# Altium PCB PCB_Current-Sensor.pcbdoc
Units mil, origin at the board's own origin, x right, y up, seen from the top; angles counter-clockwise.
Board outline 4377.04 x 3545.43 mil, 2 copper layers (Top Layer, Bottom Layer); 29 components, 17 nets, 80 pads, 116 vias.
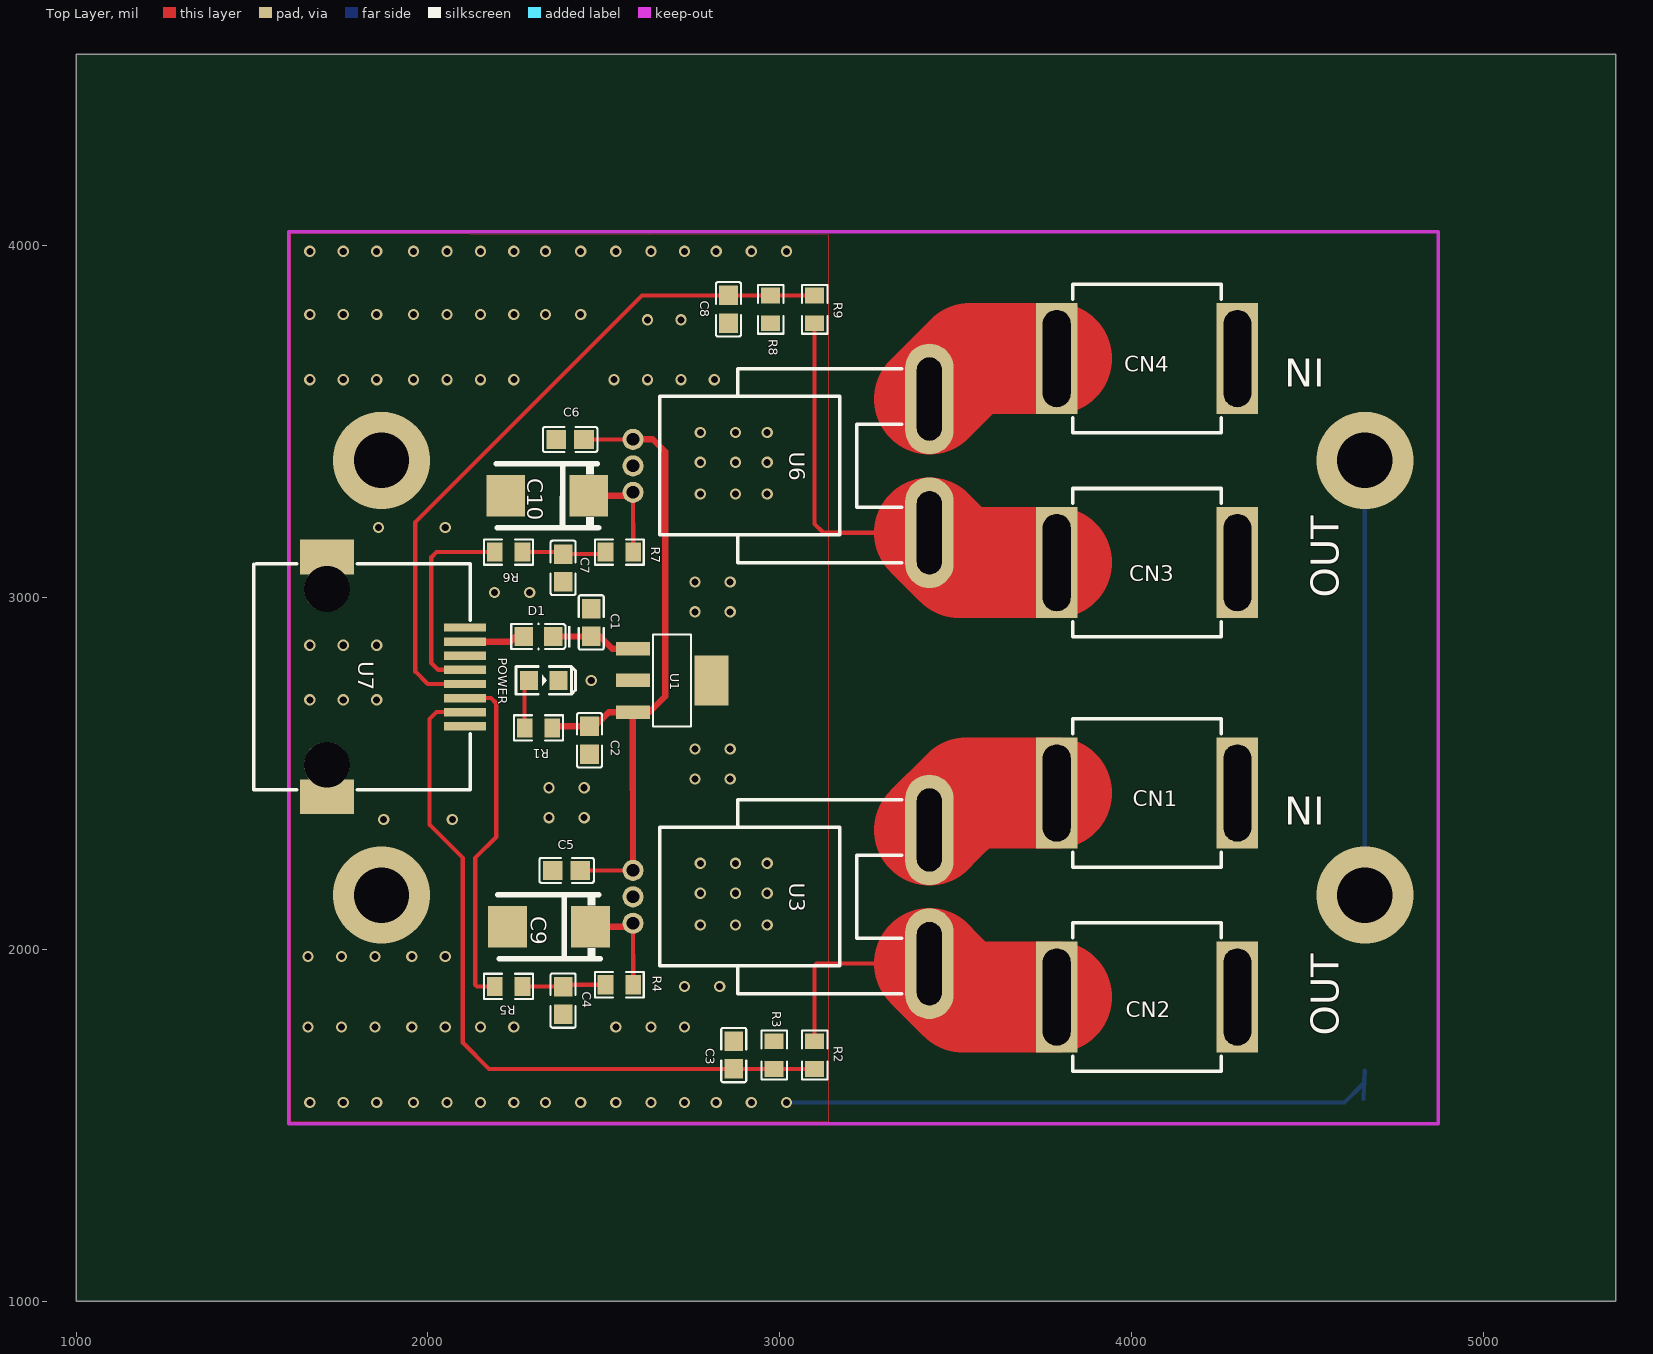
[diagram p0: Top Layer view]
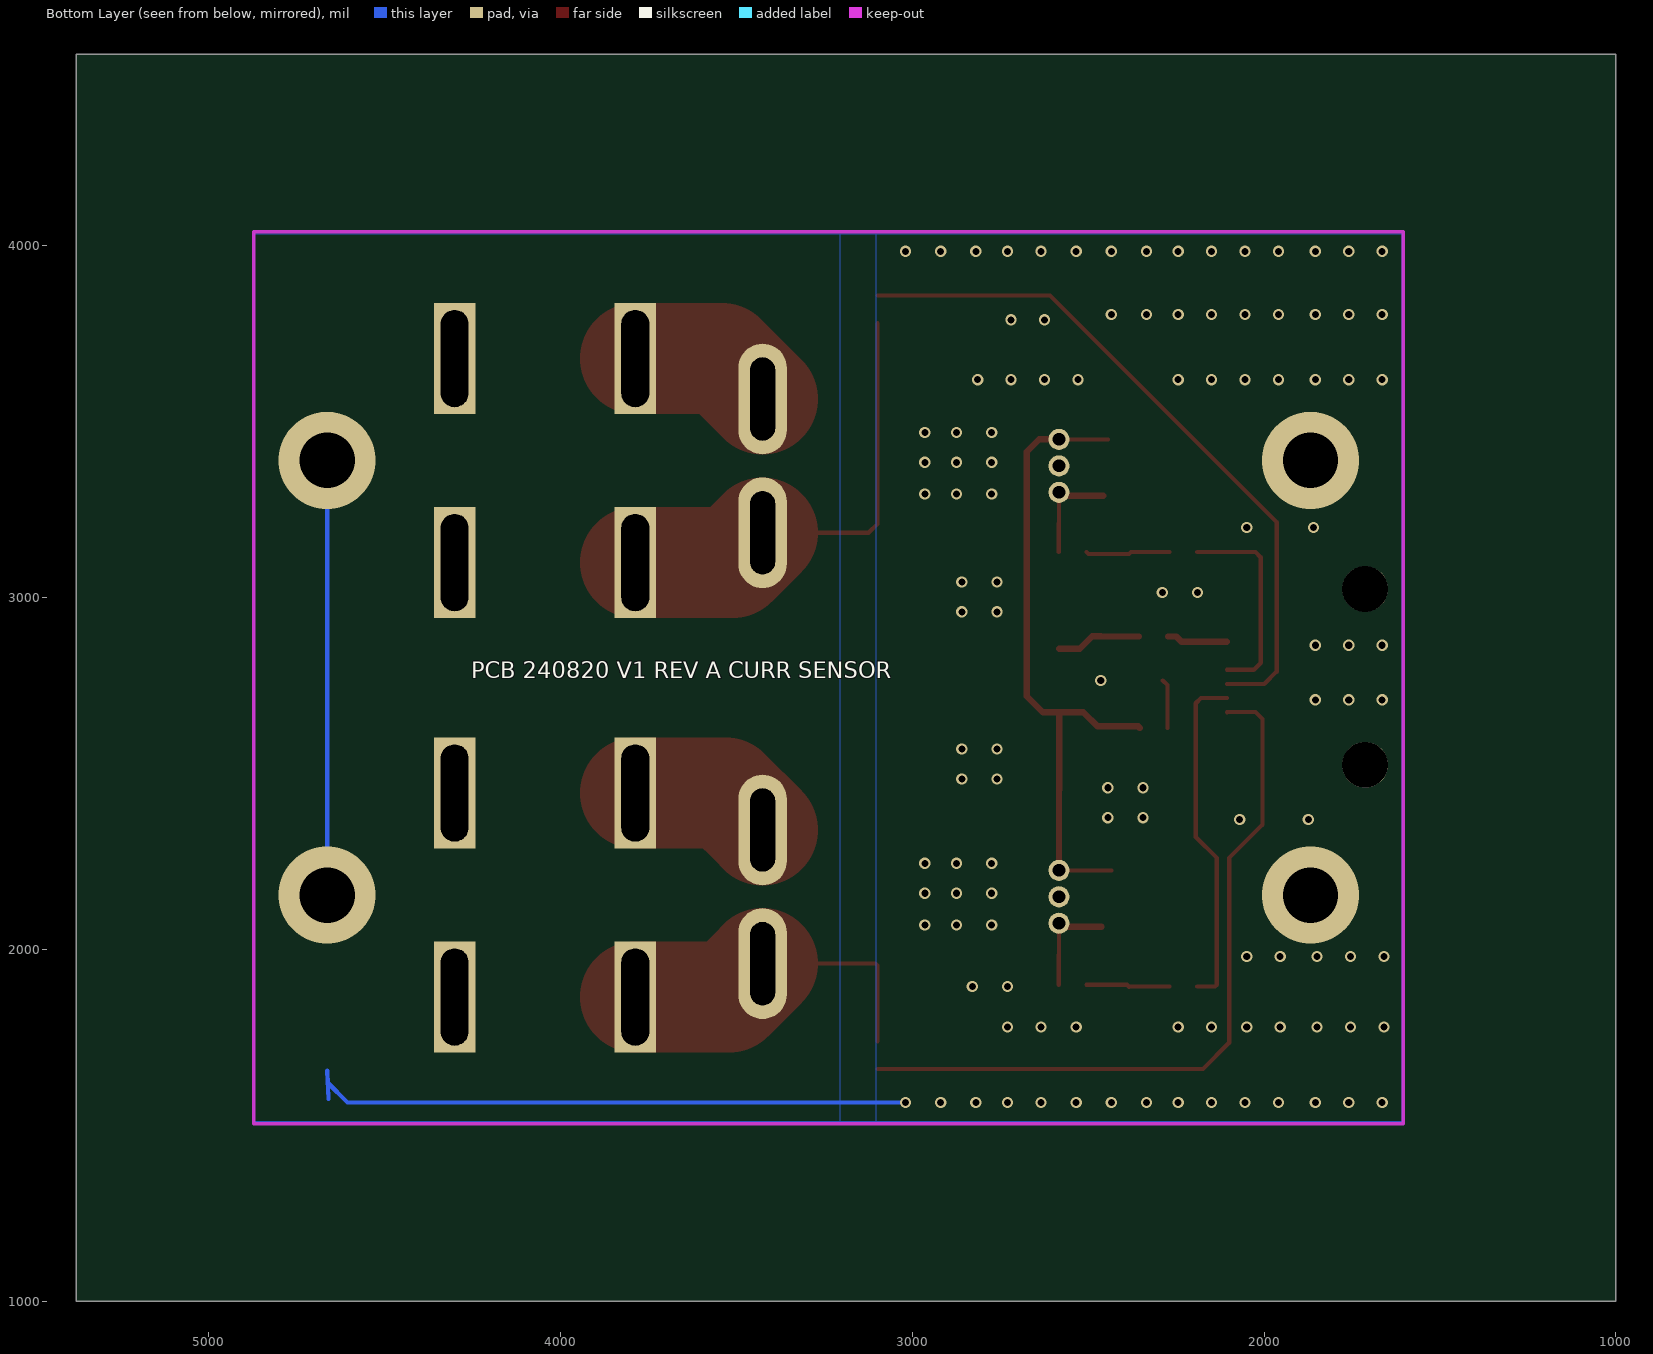
[diagram p1: Bottom Layer view, seen from below]

## Layer stack, top to bottom
Top Layer: signal copper (thickness not stored)
Dielectric: dielectric 12.6, FR-4, Dk 4.8
Bottom Layer: signal copper (thickness not stored)

## Board outline
5377.04,1000 1000,1000 1000,4545.43 5377.04,4545.43

## Components (designator, comment, footprint, x,y, rotation, side; value= is the part's Value field where it differs from the comment)
C1 "220nF" C0805 2464.33,2930 r90 top
C2 "220nF" C0805 2459.33,2595 r270 top
C3 "100nF" C0805 2869.33,1700 r90 top
C4 "100nF" C0805 2384.33,1855 r270 top
C5 "10nF" C0805 2394.33,2225 r0 top
C6 "10nF" C0805 2404.33,3450 r0 top
C7 "100nF" C0805 2384.33,3085 r270 top
C8 "100nF" C0805 2854.33,3820 r270 top
C9 "470uF" CASE-D_7343 2344.33,2065 r0 top
C10 "470uF" CASE-D_7343 2339.33,3290 r0 top
CN1 "B2A-PCB" CONN-TH_B2A-PCB 4044.33,2445 r90 top
CN2 "B2A-PCB" CONN-TH_B2A-PCB 4044.33,1865 r90 top
CN3 "B2A-PCB" CONN-TH_B2A-PCB 4044.33,3100 r90 top
CN4 "B2A-PCB" CONN-TH_B2A-PCB 4044.33,3680 r90 top
D1 "CD4148WSP-C109001" D0805-RD 2314.33,2890 r180 top
POWER "LED-0805_G" LED0805_GREEN 2329.33,2765 r0 top
R1 "1kΩ" R0805 2314.33,2630 r0 top
R2 "20k" R0805 3099.33,1700 r90 top
R3 "1k" R0805 2984.33,1700 r270 top
R4 "10Ω" R0805 2544.33,1900 r180 top
R5 "0Ω" R0805 2229.33,1895 r180 top
R6 "0Ω" R0805 2229.33,3130 r180 top
R7 "10Ω" R0805 2544.33,3130 r180 top
R8 "1k" R0805 2974.33,3820 r90 top
R9 "20k" R0805 3099.33,3820 r270 top
U1 "LM7805MP/NOPB" SOT-223-4_L6.5-W3.5-P2.30-LS7.0-BR 2694.33,2765 r180 top
U3 "ACS758LCB-100U-PFF-T" SENSOR-TH_ACS758LCB-100B-PFF-T 3004.33,2150 r270 top
U6 "ACS758LCB-100U-PFF-T" SENSOR-TH_ACS758LCB-100B-PFF-T 3004.33,3375 r270 top
U7 "RJCSE538001" RJ45-SMD_RJCSE538001 1909.33,2775 r270 top

## Footprints (in the part's own frame and the unit in brackets; to place one, negate y for a bottom-side part, rotate by r counter-clockwise, add the part's x,y. Pads: shape width x height; smd on the part's side, far side on the other; paste and mask are expansions set on the pad)
C0805 [mm]
  rect 1.41x1.35 smd paste-100 mask+0.051: 1(-1,0) 2(1,0)
  silkscreen extent -1.96,-0.9 1.96,0.9
CASE-D_7343 [mil]
  rect 110.2x118.5 smd paste+0 mask+2: 1(118.11,0) 2(-118.11,0)
  silkscreen extent -146,-91 146,91
CONN-TH_B2A-PCB [mm]
  rect 8x3 hole 2 slot 7 at 0 deg paste+0 mask+0.051: 1(0,6.522) 2(0,-6.522)
  silkscreen extent -5.35,-5.35 5.35,5.35
D0805-RD [mm]
  rect 1.335x1.35 smd paste-100 mask+0.051: 1(-1.068,0) 2(1.067,0)
  silkscreen extent -2.29,-0.94 1.96,0.94
LED0805_GREEN [mil]
  rect 51.2x55.1 smd paste+0 mask+2: 1(-41.35,0) 2(41.35,0)
  silkscreen extent -79,-39 91,39
R0805 [mil]
  rect 44.59x54.21 smd paste-3937.01 mask+2: 1(-39.37,0) 2(39.37,0)
  silkscreen extent -69,-36 69,36
RJ45-SMD_RJCSE538001 [mm]
  rect 0.6x3.05 smd paste+0 mask+0.051: 1(3.57,4.99) 2(2.55,4.99) 3(1.53,4.99) 4(0.51,4.99) 5(-0.51,4.99) 6(-1.53,4.99) 7(-2.55,4.99) 8(-3.57,4.99)
  rect 2.5x3.9 smd paste+0 mask+0.051: 9(-8.66,-4.99) 10(8.66,-4.99)
  round 3.3 hole 3.3 unplated paste+0: ""(-6.35,-4.99) ""(6.35,-4.99)
  silkscreen extent -8.16,-10.27 8.13,5.35
SENSOR-TH_ACS758LCB-100B-PFF-T [mil]
  round 60 hole 36 paste+0 mask+2: 1(-75.2,-421.25) 2(0,-421.25) 3(75.2,-421.25)
  oval 314.96x137.79 hole 70.87 slot 236.23 at 0 deg paste+0 mask+2: 4(190,421.27) 5(-190,421.27)
  silkscreen extent -276,-345 276,343
SOT-223-4_L6.5-W3.5-P2.30-LS7.0-BR [mm]
  rect 2.47x0.98 smd paste+0 mask+0.051: 1(2.835,-2.3) 2(2.835,0) 3(2.835,2.3)
  rect 2.47x3.6 smd paste+0 mask+0.051: 4(-2.835,0)
  silkscreen extent -1.37,-3.33 1.37,3.33

## Free pads (board coordinates)
  round 275.59 hole 157.48 paste+0 mask+2: ""(1868.11,2154.61) ""(1868.11,3390.82) ""(4663.38,2154.61) ""(4663.38,3390.82)

## Via types
v1: diameter 32, hole 20, Top Layer to Bottom Layer, tented both sides, 112 vias
v2: diameter 275.59, hole 157.48, Top Layer to Bottom Layer, tented both sides, 4 vias

## Nets (pads, with @x,y where several pads share a name; then routed paths per layer and width w, separated by ;. In a path a pad name is that pad's centre, name@x,y a point inside that pad or via, vN(x,y) a via of type N, cw(c..) or ccw(c..) an arc to the next point about the centre after c; other vN are vias at no path point)
+5V: C2.1 C5.2 C6.2 R1.2 U1.3 U3.1 U6.1 | length 1897
  Top Layer w12: C5.2 U3.1 ; C6.2 U6.1
  Top Layer w18: R1.2 2358.03,2634.4 C2.1 2473.73,2634.4 2514.33,2675 U1.3@2582.73,2674.5 ; U3.1 U1.3@2582.73,2674.5 ; U6.1 2639.13,3450.2 2674.33,3415 2674.33,2720 2628.73,2674.5 U1.3@2582.73,2674.5
+12V: D1.2 U7.7 | length 172.5
  Top Layer w18: U7.7 2234.73,2875.4 2249.33,2890 D1.2
C7_1: C7.1 R6.1 R7.2 | length 240.8
  Top Layer w12: R6.1 2378.73,3130 C7.1 2499.33,3124.4 R7.2@2504.93,3130
GND: C1.2 C2.2 C3.2 C4.2 C5.1 C6.1 C7.2 C8.2 C9.2 C10.2 pad. POWER.2 R3.1 R8.1 U1.2 U1.4 U3.2 U6.2 U7.1 U7.8 U7.9 U7.10 | length 2982.3
  Bottom Layer w12: v1(3019.33,1565) 4605.38,1565 4661.63,1621.26 ; 4659.33,1575 4663.33,1655.4 ; v2(4663.38,2154.6) v2(4663.38,3390.82)
  other v1: 1664.33,1565 1759.33,1565 1854.33,1565 1959.33,1565 2054.33,1565 2149.33,1565 2244.33,1565 2334.33,1565 2434.33,1565 2534.33,1565 2634.33,1565 2729.33,1565 2819.33,1565 2919.33,1565 1659.33,1780 1754.33,1780 1849.33,1780 1954.33,1780 2049.33,1780 2149.33,1780 2244.33,1780 2534.33,1780 2634.33,1780 2729.33,1780 2729.33,1895 2829.33,1895 1659.33,1980 1754.33,1980 1849.33,1980 1954.33,1980 2049.33,1980 2774.33,2070 2874.33,2070 2964.33,2070 2774.33,2160 2874.33,2160 2964.33,2160 2774.33,2245 2874.33,2245 2964.33,2245 1874.33,2370 2069.33,2370 2344.33,2375 2444.33,2375 2344.33,2460 2444.33,2460 2759.33,2485 2859.33,2485 2759.33,2570 2859.33,2570 1664.33,2710 1759.33,2710 1854.33,2710 2464.33,2765 1664.33,2865 1759.33,2865 1854.33,2865 2759.33,2960 2859.33,2960 2189.33,3015 2289.33,3015 2759.33,3045 2859.33,3045 1859.33,3200 2049.33,3200 2774.33,3295 2874.33,3295 2964.33,3295 2774.33,3385 2874.33,3385 2964.33,3385 2774.33,3470 2874.33,3470 2964.33,3470 1664.33,3620 1759.33,3620 1854.33,3620 1959.33,3620 2054.33,3620 2149.33,3620 2244.33,3620 2529.33,3620 2624.33,3620 2719.33,3620 2814.33,3620 2624.33,3790 2719.33,3790 1664.33,3805 1759.33,3805 1854.33,3805 1959.33,3805 2054.33,3805 2149.33,3805 2244.33,3805 2334.33,3805 2434.33,3805 1664.33,3985 1759.33,3985 1854.33,3985 1959.33,3985 2054.33,3985 2149.33,3985 2244.33,3985 2334.33,3985 2434.33,3985 2534.33,3985 2634.33,3985 2729.33,3985 2819.33,3985 2919.33,3985 3019.33,3985
  other v2: 1868.11,2154.6 1868.11,3390.82
ICC_1: R5.2 U7.3 | length 977.2
  Top Layer w12: U7.3 2179.33,2715 2194.33,2700 2194.33,2320 2134.33,2260 2134.33,1900 2139.33,1895 R5.2@2189.93,1895
ICC_2: R6.2 U7.5 | length 591.6
  Top Layer w12: U7.5 2029.23,2795.1 2009.33,2815 2009.33,3115 2024.33,3130 R6.2@2189.93,3130
R1_1: POWER.1 R1.1 | length 140.4
  Top Layer w12: R1.1@2274.93,2630 2274.93,2752 POWER.1@2287.93,2765
R4_2: C4.1 R4.2 R5.1 | length 238.8
  Top Layer w12: R5.1 2383.73,1895 C4.1 2389.93,1900 R4.2@2504.93,1900
U1_1: C1.1 D1.1 U1.1 | length 241.4
  Top Layer w18: D1.1@2356.33,2890 2463.73,2890 C1.1 2488.73,2890.6 2524.33,2855 U1.1@2582.73,2855.5
U3_3: C9.1 R4.1 U3.3 | length 299.6
  Top Layer w12: U3.3 R4.1
  Top Layer w18: C9.1 2573.33,2065 U3.3
U3_4: CN2.1 R2.2 U3.4 | length 945.2
  Top Layer w12: R2.2 3099.33,1955 3104.33,1960 U3.4
  Top Layer w314.96: U3.4 3520.63,1865 CN2.1
U3_5: CN1.1 U3.5 | length 405.4
  Top Layer w314.96: U3.5 3530.63,2445 CN1.1
U6_3: C10.1 R7.1 U6.3 | length 299.5
  Top Layer w12: U6.3 R7.1
  Top Layer w18: C10.1 2573.28,3290 U6.3
U6_4: CN3.1 R9.2 U6.4 | length 1304.4
  Top Layer w12: R9.2 3099.33,3210 3124.33,3185 U6.4
  Top Layer w314.96: U6.4 3510.63,3100 CN3.1
U6_5: CN4.1 U6.5 | length 409.5
  Top Layer w314.96: U6.5 3540.63,3680 CN4.1
VCC_1: C3.1 R2.1 R3.2 U7.2 | length 2100
  Top Layer w12: U7.2 2024.33,2675 2004.33,2655 2004.33,2355 2099.33,2260 2099.33,1735 2173.73,1660.6 C3.1 R3.2 R2.1
VCC_2: C8.1 R8.2 R9.1 U7.4 | length 1983
  Top Layer w12: U7.4 1999.43,2754.9 1964.33,2790 1964.33,3215 2608.73,3859.4 C8.1 R8.2 R9.1
pads on no net: CN1.2 CN2.2 CN3.2 CN4.2 U7. U7.6

## Polygon pours and split planes (outlines as drawn)
GND on Bottom Layer (solid): 1609.33,4035 1609.33,1510 3204.33,1510 3204.33,4035
GND on Bottom Layer (solid): 4869.33,4035 3104.33,4035 3104.33,1510 4869.33,1510 4869.33,4035
GND on Top Layer (solid): 1609.33,4035 1609.33,1510 3139.33,1510 3139.33,4030

## Silkscreen, mask and mechanical layers (free items; w line width, h text height)
Top Overlay:
  text "IN" at 4549.33,3680 h80 r180
  text "OUT" at 4589.33,3000 h80 r90
  text "IN" at 4549.33,2435 h80 r180
  text "OUT" at 4589.33,1755 h80 r90
Bottom Overlay:
  text "PCB 240820 V1 REV A CURR SENSOR" at 4254.33,2755 h80